# Altium PCB COF.PcbDoc (part 5 of 5)
Units mm, origin at the board's own origin, x right, y up, seen from the top; angles counter-clockwise.
Board outline 42.1 x 32.68 mm, 2 copper layers (TOP, BOTTOM), stack 0.321 mm thick; 42 components, 54 nets, 189 pads, 156 vias.
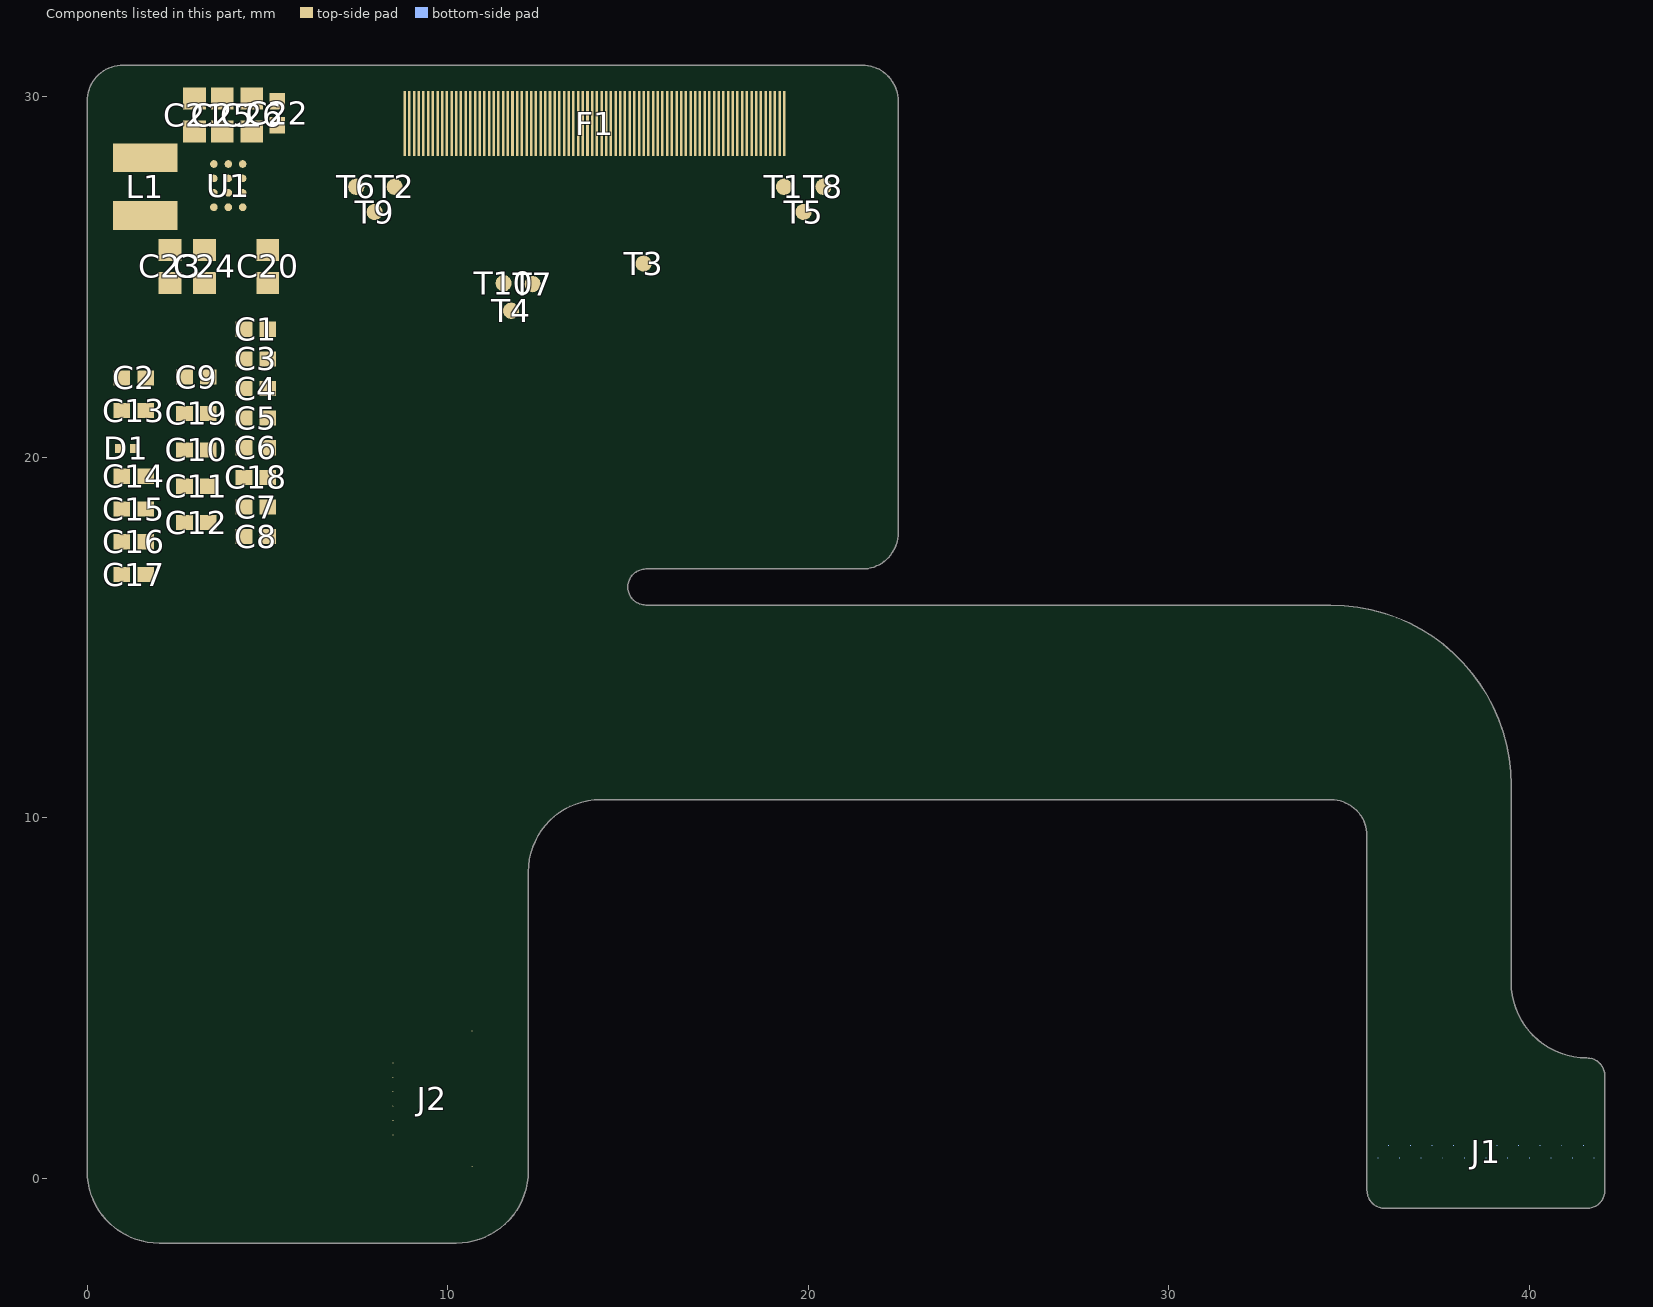
[diagram p4: the components of this part, seen from the top]

## Silkscreen, mask and mechanical layers (free items; w line width, h text height) (continued)
Fab Notes: (continued)
  text "408" at 15.683,33.612 h0.01
  text "S<144>" at 15.73,33.605 h0.01
  text "410" at 15.737,33.612 h0.01
  text "S<146>" at 15.784,33.605 h0.01
  text "412" at 15.791,33.612 h0.01
  text "S<148>" at 15.838,33.605 h0.01
  text "414" at 15.845,33.612 h0.01
  text "S<150>" at 15.892,33.605 h0.01
  text "416" at 15.899,33.612 h0.01
  text "S<152>" at 15.946,33.605 h0.01
  text "418" at 15.953,33.612 h0.01
  text "S<154>" at 16,33.605 h0.01
  text "420" at 16.007,33.612 h0.01
  text "S<156>" at 16.054,33.605 h0.01
  text "422" at 16.061,33.612 h0.01
  text "S<158>" at 16.108,33.605 h0.01
  text "424" at 16.115,33.612 h0.01
  text "S<160>" at 16.162,33.605 h0.01
  text "426" at 16.169,33.612 h0.01
  text "S<162>" at 16.216,33.605 h0.01
  text "428" at 16.223,33.612 h0.01
  text "S<164>" at 16.27,33.605 h0.01
  text "430" at 16.277,33.612 h0.01
  text "S<166>" at 16.324,33.605 h0.01
  text "432" at 16.331,33.612 h0.01
  text "S<168>" at 16.378,33.605 h0.01
  text "434" at 16.385,33.612 h0.01
  text "S<170>" at 16.432,33.605 h0.01
  text "436" at 16.439,33.612 h0.01
  text "S<172>" at 16.486,33.605 h0.01
  text "438" at 16.493,33.612 h0.01
  text "S<174>" at 16.54,33.605 h0.01
  text "440" at 16.547,33.612 h0.01
  text "S<176>" at 16.594,33.605 h0.01
  text "442" at 16.601,33.612 h0.01
  text "S<178>" at 16.648,33.605 h0.01
  text "444" at 16.655,33.612 h0.01
  text "S<180>" at 16.702,33.605 h0.01
  text "446" at 16.709,33.612 h0.01
  text "S<182>" at 16.756,33.605 h0.01
  text "448" at 16.763,33.612 h0.01
  text "S<184>" at 16.81,33.605 h0.01
  text "450" at 16.817,33.612 h0.01
  text "S<186>" at 16.864,33.605 h0.01
  text "452" at 16.871,33.612 h0.01
  text "S<188>" at 16.918,33.605 h0.01
  text "454" at 16.925,33.612 h0.01
  text "S<190>" at 16.972,33.605 h0.01
  text "456" at 16.979,33.612 h0.01
  text "S<192>" at 17.026,33.605 h0.01
  text "458" at 17.033,33.612 h0.01
  text "S<194>" at 17.08,33.605 h0.01
  text "460" at 17.087,33.612 h0.01
  text "S<196>" at 17.134,33.605 h0.01
  text "462" at 17.141,33.612 h0.01
  text "S<198>" at 17.188,33.605 h0.01
  text "464" at 17.195,33.612 h0.01
  text "S<200>" at 17.242,33.605 h0.01
  text "466" at 17.249,33.612 h0.01
  text "S<202>" at 17.296,33.605 h0.01
  text "468" at 17.303,33.612 h0.01
  text "S<204>" at 17.35,33.605 h0.01
  text "470" at 17.357,33.612 h0.01
  text "S<206>" at 17.404,33.605 h0.01
  text "472" at 17.411,33.612 h0.01
  text "S<208>" at 17.458,33.605 h0.01
  text "474" at 17.465,33.612 h0.01
  text "S<210>" at 17.512,33.605 h0.01
  text "476" at 17.519,33.612 h0.01
  text "S<212>" at 17.566,33.605 h0.01
  text "478" at 17.573,33.612 h0.01
  text "S<214>" at 17.62,33.605 h0.01
  text "480" at 17.627,33.612 h0.01
  text "S<216>" at 17.674,33.605 h0.01
  text "482" at 17.681,33.612 h0.01
  text "S<218>" at 17.728,33.605 h0.01
  text "484" at 17.735,33.612 h0.01
  text "S<220>" at 17.782,33.605 h0.01
  text "486" at 17.789,33.612 h0.01
  text "S<222>" at 17.836,33.605 h0.01
  text "488" at 17.843,33.612 h0.01
  text "S<224>" at 17.89,33.605 h0.01
  text "490" at 17.897,33.612 h0.01
  text "S<226>" at 17.944,33.605 h0.01
  text "492" at 17.951,33.612 h0.01
  text "S<228>" at 17.998,33.605 h0.01
  text "494" at 18.005,33.612 h0.01
  text "S<230>" at 18.052,33.605 h0.01
  text "496" at 18.059,33.612 h0.01
  text "S<232>" at 18.106,33.605 h0.01
  text "498" at 18.113,33.612 h0.01
  text "S<234>" at 18.16,33.605 h0.01
  text "500" at 18.167,33.612 h0.01
  text "DUMMY" at 18.235,33.605 h0.01
  text "502" at 18.243,33.612 h0.01
  text "VINT" at 18.304,33.605 h0.01
  text "504" at 18.306,33.612 h0.01
  text "VGH" at 18.368,33.605 h0.01
  text "506" at 18.369,33.612 h0.01
  text "VGL" at 18.431,33.605 h0.01
  text "508" at 18.432,33.612 h0.01
  text "DUMMY" at 18.487,33.605 h0.01
  text "510" at 18.495,33.612 h0.01
  text "GOA_L<1>" at 18.546,33.605 h0.01
  text "512" at 18.558,33.612 h0.01
  text "GOA_L<3>" at 18.609,33.605 h0.01
  text "514" at 18.621,33.612 h0.01
  text "GOA_L<5>" at 18.672,33.605 h0.01
  text "516" at 18.684,33.612 h0.01
  text "GOA_L<7>" at 18.735,33.605 h0.01
  text "518" at 18.747,33.612 h0.01
  text "GOA_L<9>" at 18.798,33.605 h0.01
  text "520" at 18.81,33.612 h0.01
  text "GOA_L<11>" at 18.859,33.605 h0.01
  text "522" at 18.873,33.612 h0.01
  text "GOA_L<13>" at 18.922,33.605 h0.01
  text "524" at 18.936,33.612 h0.01
  text "GOA_L<15>" at 18.985,33.605 h0.01
  text "526" at 18.999,33.612 h0.01
  text "Face Down" at 13.815,33.356 h0.08
  text "DUMMY_VGL" at 8.945,33.09 h0.01
  text "190" at 8.967,33.099 h0.01
  text "VGL" at 9.02,33.09 h0.01
  text "189" at 9.021,33.099 h0.01
  text "VGL" at 9.074,33.09 h0.01
  text "188" at 9.075,33.099 h0.01
  text "VGH" at 9.127,33.09 h0.01
  text "187" at 9.129,33.099 h0.01
  text "VGH" at 9.181,33.09 h0.01
  text "186" at 9.183,33.099 h0.01
  text "VINT" at 9.234,33.09 h0.01
  text "185" at 9.236,33.099 h0.01
  text "VINT" at 9.288,33.09 h0.01
  text "184" at 9.291,33.099 h0.01
  text "VLOUT2" at 9.335,33.09 h0.01
  text "183" at 9.345,33.099 h0.01
  text "VLOUT2" at 9.389,33.09 h0.01
  text "182" at 9.399,33.099 h0.01
  text "VLOUT2" at 9.443,33.09 h0.01
  text "181" at 9.454,33.099 h0.01
  text "VLOUT2" at 9.497,33.09 h0.01
  text "180" at 9.507,33.099 h0.01
  text "C41N" at 9.557,33.09 h0.01
  text "179" at 9.561,33.099 h0.01
  text "C41N" at 9.611,33.09 h0.01
  text "178" at 9.615,33.099 h0.01
  text "C41N" at 9.665,33.09 h0.01
  text "177" at 9.669,33.099 h0.01
  text "C41P" at 9.719,33.09 h0.01
  text "176" at 9.723,33.099 h0.01
  text "C41P" at 9.773,33.09 h0.01
  text "175" at 9.776,33.099 h0.01
  text "C41P" at 9.827,33.09 h0.01
  text "174" at 9.831,33.099 h0.01
  text "AVDD" at 9.88,33.09 h0.01
  text "173" at 9.885,33.099 h0.01
  text "AVDD" at 9.934,33.09 h0.01
  text "172" at 9.939,33.099 h0.01
  text "AVDD" at 9.988,33.09 h0.01
  text "171" at 9.994,33.099 h0.01
  text "AVDD" at 10.042,33.09 h0.01
  text "170" at 10.047,33.099 h0.01
  text "VSSC" at 10.096,33.09 h0.01
  text "169" at 10.101,33.099 h0.01
  text "VSSC" at 10.15,33.09 h0.01
  text "168" at 10.155,33.099 h0.01
  text "VSSC" at 10.204,33.09 h0.01
  text "167" at 10.209,33.099 h0.01
  text "VSSC" at 10.258,33.09 h0.01
  text "166" at 10.263,33.099 h0.01
  text "VSSA" at 10.312,33.09 h0.01
  text "165" at 10.316,33.099 h0.01
  text "VSSA" at 10.366,33.09 h0.01
  text "164" at 10.371,33.099 h0.01
  text "VSSA" at 10.42,33.09 h0.01
  text "163" at 10.425,33.099 h0.01
  text "VLOUT3" at 10.469,33.09 h0.01
  text "162" at 10.479,33.099 h0.01
  text "VLOUT3" at 10.523,33.09 h0.01
  text "161" at 10.534,33.099 h0.01
  text "VLOUT3" at 10.577,33.09 h0.01
  text "160" at 10.587,33.099 h0.01
  text "VLOUT3" at 10.631,33.09 h0.01
  text "159" at 10.641,33.099 h0.01
  text "C51N" at 10.691,33.09 h0.01
  text "158" at 10.695,33.099 h0.01
  text "C51N" at 10.745,33.09 h0.01
  text "157" at 10.749,33.099 h0.01
  text "C51N" at 10.799,33.09 h0.01
  text "156" at 10.803,33.099 h0.01
  text "C51P" at 10.853,33.09 h0.01
  text "155" at 10.856,33.099 h0.01
  text "C51P" at 10.907,33.09 h0.01
  text "154" at 10.911,33.099 h0.01
  text "C51P" at 10.961,33.09 h0.01
  text "153" at 10.965,33.099 h0.01
  text "VCL" at 11.018,33.09 h0.01
  text "152" at 11.019,33.099 h0.01
  text "VCL" at 11.072,33.09 h0.01
  text "151" at 11.074,33.099 h0.01
  text "VCL" at 11.126,33.09 h0.01
  text "150" at 11.127,33.099 h0.01
  text "149" at 11.181,33.099 h0.01
  text "VCI" at 11.182,33.09 h0.01
  text "148" at 11.235,33.099 h0.01
  text "VCI" at 11.236,33.09 h0.01
  text "147" at 11.289,33.099 h0.01
  text "VCI" at 11.29,33.09 h0.01
  text "NVREF" at 11.335,33.09 h0.01
  text "146" at 11.343,33.099 h0.01
  text "VMON" at 11.392,33.09 h0.01
  text "145" at 11.396,33.099 h0.01
  text "VREF" at 11.447,33.09 h0.01
  text "144" at 11.451,33.099 h0.01
  text "VDD" at 11.503,33.09 h0.01
  text "143" at 11.505,33.099 h0.01
  text "VDD" at 11.558,33.09 h0.01
  text "142" at 11.559,33.099 h0.01
  text "VDDI" at 11.611,33.09 h0.01
  text "141" at 11.614,33.099 h0.01
  text "VDDI" at 11.665,33.09 h0.01
  text "140" at 11.667,33.099 h0.01
  text "TEST_OUT2" at 11.702,33.09 h0.01
  text "139" at 11.721,33.099 h0.01
  text "TEST_OUT1" at 11.757,33.09 h0.01
  text "138" at 11.775,33.099 h0.01
  text "137" at 11.829,33.099 h0.01
  text "TE" at 11.831,33.09 h0.01
  text "OSC_FUSE" at 11.866,33.09 h0.01
  text "136" at 11.883,33.099 h0.01
  text "EL_CTRL" at 11.924,33.09 h0.01
  text "135" at 11.936,33.099 h0.01
  text "TOUT" at 11.986,33.09 h0.01
  text "134" at 11.991,33.099 h0.01
  text "ERR_FG" at 12.034,33.09 h0.01
  text "133" at 12.045,33.099 h0.01
  text "VSSI" at 12.097,33.09 h0.01
  text "132" at 12.099,33.099 h0.01
  text "D<7>" at 12.149,33.09 h0.01
  text "131" at 12.154,33.099 h0.01
  text "D<6>" at 12.203,33.09 h0.01
  text "130" at 12.207,33.099 h0.01
  text "D<5>" at 12.257,33.09 h0.01
  text "129" at 12.261,33.099 h0.01
  text "D<4>" at 12.311,33.09 h0.01
  text "128" at 12.315,33.099 h0.01
  text "D<3>" at 12.365,33.09 h0.01
  text "127" at 12.369,33.099 h0.01
  text "D<2>" at 12.419,33.09 h0.01
  text "126" at 12.423,33.099 h0.01
  text "SDI3_D<1>" at 12.46,33.09 h0.01
  text "125" at 12.476,33.099 h0.01
  text "SDI2_D<0>" at 12.514,33.09 h0.01
  text "124" at 12.531,33.099 h0.01
  text "SDI_RDX" at 12.572,33.09 h0.01
  text "123" at 12.585,33.099 h0.01
  text "SDO_SDI1" at 12.625,33.09 h0.01
  text "122" at 12.639,33.099 h0.01
  text "CSX" at 12.691,33.09 h0.01
  text "121" at 12.694,33.099 h0.01
  text "SCL_WRX" at 12.732,33.09 h0.01
  text "120" at 12.747,33.099 h0.01
  text "DCX" at 12.798,33.09 h0.01
  text "119" at 12.801,33.099 h0.01
  text "OTP_NOLOAD" at 12.831,33.09 h0.01
  text "118" at 12.855,33.099 h0.01
  text "TMODE<3>" at 12.892,33.09 h0.01
  text "117" at 12.909,33.099 h0.01
  text "TMODE<2>" at 12.946,33.09 h0.01
  text "116" at 12.963,33.099 h0.01
  text "TMODE<1>" at 13,33.09 h0.01
  text "115" at 13.016,33.099 h0.01
  text "TMODE<0>" at 13.054,33.09 h0.01
  text "114" at 13.071,33.099 h0.01
  text "VSSI" at 13.123,33.09 h0.01
  text "113" at 13.125,33.099 h0.01
  text "VSSI" at 13.177,33.09 h0.01
  text "112" at 13.179,33.099 h0.01
  text "VSSI" at 13.231,33.09 h0.01
  text "111" at 13.234,33.099 h0.01
  text "D0N" at 13.286,33.09 h0.01
  text "110" at 13.287,33.099 h0.01
  text "D0N" at 13.34,33.09 h0.01
  text "109" at 13.341,33.099 h0.01
  text "D0N" at 13.394,33.09 h0.01
  text "108" at 13.395,33.099 h0.01
  text "D0P" at 13.448,33.09 h0.01
  text "107" at 13.449,33.099 h0.01
  text "D0P" at 13.502,33.09 h0.01
  text "106" at 13.503,33.099 h0.01
  text "D0P" at 13.556,33.09 h0.01
  text "105" at 13.556,33.099 h0.01
  text "VSSI" at 13.609,33.09 h0.01
  text "104" at 13.611,33.099 h0.01
  text "CKN" at 13.663,33.09 h0.01
  text "103" at 13.665,33.099 h0.01
  text "CKN" at 13.717,33.09 h0.01
  text "102" at 13.719,33.099 h0.01
  text "CKN" at 13.771,33.09 h0.01
  text "101" at 13.774,33.099 h0.01
  text "CKP" at 13.825,33.09 h0.01
  text "100" at 13.827,33.099 h0.01
  text "CKP" at 13.879,33.09 h0.01
  text "99" at 13.884,33.099 h0.01
  text "CKP" at 13.933,33.09 h0.01
  text "98" at 13.938,33.099 h0.01
  text "VSSI" at 13.987,33.09 h0.01
  text "97" at 13.992,33.099 h0.01
  text "VSSI" at 14.041,33.09 h0.01
  text "96" at 14.046,33.099 h0.01
  text "VSSI" at 14.095,33.09 h0.01
  text "95" at 14.1,33.099 h0.01
  text "VSSI" at 14.149,33.09 h0.01
  text "94" at 14.154,33.099 h0.01
  text "VSSI" at 14.203,33.09 h0.01
  text "93" at 14.208,33.099 h0.01
  text "VSSI" at 14.257,33.09 h0.01
  text "92" at 14.262,33.099 h0.01
  text "VDD" at 14.312,33.09 h0.01
  text "91" at 14.317,33.099 h0.01
  text "VDD" at 14.366,33.09 h0.01
  text "90" at 14.37,33.099 h0.01
  text "VDD" at 14.42,33.09 h0.01
  text "89" at 14.424,33.099 h0.01
  text "VDD" at 14.474,33.09 h0.01
  text "88" at 14.478,33.099 h0.01
  text "VDD" at 14.528,33.09 h0.01
  text "87" at 14.532,33.099 h0.01
  text "VDD" at 14.582,33.09 h0.01
  text "86" at 14.586,33.099 h0.01
  text "VDDI" at 14.635,33.09 h0.01
  text "85" at 14.64,33.099 h0.01
  text "VDDI" at 14.689,33.09 h0.01
  text "84" at 14.694,33.099 h0.01
  text "VDDI" at 14.743,33.09 h0.01
  text "83" at 14.748,33.099 h0.01
  text "VDDI" at 14.797,33.09 h0.01
  text "82" at 14.802,33.099 h0.01
  text "VDDI" at 14.851,33.09 h0.01
  text "81" at 14.857,33.099 h0.01
  text "VDDI" at 14.905,33.09 h0.01
  text "80" at 14.91,33.099 h0.01
  text "VDDI" at 14.959,33.09 h0.01
  text "79" at 14.964,33.099 h0.01
  text "VSSA" at 15.01,33.09 h0.01
  text "78" at 15.018,33.099 h0.01
  text "VSSA" at 15.064,33.09 h0.01
  text "77" at 15.072,33.099 h0.01
  text "VSSA" at 15.118,33.09 h0.01
  text "76" at 15.126,33.099 h0.01
  text "VSSA" at 15.172,33.09 h0.01
  text "75" at 15.18,33.099 h0.01
  text "VSSA" at 15.226,33.09 h0.01
  text "74" at 15.234,33.099 h0.01
  text "RVDD_ON" at 15.27,33.09 h0.01
  text "73" at 15.288,33.099 h0.01
  text "RESX" at 15.333,33.09 h0.01
  text "72" at 15.342,33.099 h0.01
  text "TIN2" at 15.391,33.09 h0.01
  text "71" at 15.397,33.099 h0.01
  text "TIN1" at 15.446,33.09 h0.01
  text "70" at 15.45,33.099 h0.01
  text "BIST" at 15.498,33.09 h0.01
  text "69" at 15.504,33.099 h0.01
  text "PSWAP" at 15.546,33.09 h0.01
  text "68" at 15.558,33.099 h0.01
  text "TEST_IN" at 15.598,33.09 h0.01
  text "67" at 15.612,33.099 h0.01
  text "IM<0>" at 15.657,33.09 h0.01
  text "66" at 15.666,33.099 h0.01
  text "IM<1>" at 15.711,33.09 h0.01
  text "65" at 15.72,33.099 h0.01
  text "IM<2>" at 15.765,33.09 h0.01
  text "64" at 15.774,33.099 h0.01
  text "EXTCLK" at 15.814,33.09 h0.01
  text "63" at 15.828,33.099 h0.01
  text "VSSI" at 15.877,33.09 h0.01
  text "62" at 15.882,33.099 h0.01
  text "VSSI" at 15.931,33.09 h0.01
  text "61" at 15.937,33.099 h0.01
  text "VDDI" at 15.985,33.09 h0.01
  text "60" at 15.99,33.099 h0.01
  text "VDDI" at 16.039,33.09 h0.01
  text "59" at 16.044,33.099 h0.01
  text "VOTP" at 16.091,33.09 h0.01
  text "58" at 16.098,33.099 h0.01
  text "VDD" at 16.148,33.09 h0.01
  text "57" at 16.152,33.099 h0.01
  text "VDD" at 16.202,33.09 h0.01
  text "56" at 16.206,33.099 h0.01
  text "VREGOUT" at 16.242,33.09 h0.01
  text "55" at 16.26,33.099 h0.01
  text "VGS" at 16.309,33.09 h0.01
  text "54" at 16.314,33.099 h0.01
  text "VCL" at 16.364,33.09 h0.01
  text "53" at 16.368,33.099 h0.01
  text "VCL" at 16.418,33.09 h0.01
  text "52" at 16.422,33.099 h0.01
  text "VCL" at 16.472,33.09 h0.01
  text "51" at 16.477,33.099 h0.01
  text "VCL" at 16.526,33.09 h0.01
  text "50" at 16.53,33.099 h0.01
  text "C32N" at 16.577,33.09 h0.01
  text "49" at 16.584,33.099 h0.01
  text "C32N" at 16.631,33.09 h0.01
  text "48" at 16.638,33.099 h0.01
  text "C32N" at 16.685,33.09 h0.01
  text "47" at 16.692,33.099 h0.01
  text "C32P" at 16.739,33.09 h0.01
  text "46" at 16.746,33.099 h0.01
  text "C32P" at 16.793,33.09 h0.01
  text "45" at 16.8,33.099 h0.01
  text "C32P" at 16.847,33.09 h0.01
  text "44" at 16.854,33.099 h0.01
  text "C31N" at 16.901,33.09 h0.01
  text "43" at 16.908,33.099 h0.01
  text "C31N" at 16.955,33.09 h0.01
  text "42" at 16.962,33.099 h0.01
  text "C31N" at 17.009,33.09 h0.01
  text "41" at 17.017,33.099 h0.01
  text "C31P" at 17.063,33.09 h0.01
  text "40" at 17.07,33.099 h0.01
  text "C31P" at 17.117,33.09 h0.01
  text "39" at 17.124,33.099 h0.01
  text "C31P" at 17.171,33.09 h0.01
  text "38" at 17.178,33.099 h0.01
  text "VSSC" at 17.224,33.09 h0.01
  text "37" at 17.232,33.099 h0.01
  text "VSSC" at 17.278,33.09 h0.01
  text "36" at 17.286,33.099 h0.01
  text "VSSC" at 17.332,33.09 h0.01
  text "35" at 17.34,33.099 h0.01
  text "VCI" at 17.392,33.09 h0.01
  text "34" at 17.394,33.099 h0.01
  text "VCI" at 17.446,33.09 h0.01
  text "33" at 17.448,33.099 h0.01
  text "VCI" at 17.5,33.09 h0.01
  text "32" at 17.502,33.099 h0.01
  text "VCI" at 17.554,33.09 h0.01
  text "31" at 17.557,33.099 h0.01
  text "AVDD" at 17.602,33.09 h0.01
  text "30" at 17.61,33.099 h0.01
  text "AVDD" at 17.656,33.09 h0.01
  text "29" at 17.664,33.099 h0.01
  text "AVDD" at 17.71,33.09 h0.01
  text "28" at 17.718,33.099 h0.01
  text "AVDD" at 17.764,33.09 h0.01
  text "27" at 17.772,33.099 h0.01
  text "C12N" at 17.819,33.09 h0.01
  text "26" at 17.826,33.099 h0.01
  text "C12N" at 17.873,33.09 h0.01
  text "25" at 17.88,33.099 h0.01
  text "C12N" at 17.927,33.09 h0.01
  text "24" at 17.934,33.099 h0.01
  text "C12P" at 17.981,33.09 h0.01
  text "23" at 17.988,33.099 h0.01
  text "C12P" at 18.035,33.09 h0.01
  text "22" at 18.042,33.099 h0.01
  text "C12P" at 18.089,33.09 h0.01
  text "21" at 18.097,33.099 h0.01
  text "C11N" at 18.143,33.09 h0.01
  text "20" at 18.15,33.099 h0.01
  text "C11N" at 18.197,33.09 h0.01
  text "19" at 18.203,33.099 h0.01
  text "C11N" at 18.251,33.09 h0.01
  text "18" at 18.257,33.099 h0.01
  text "C11P" at 18.305,33.09 h0.01
  text "17" at 18.311,33.099 h0.01
  text "C11P" at 18.359,33.09 h0.01
  text "16" at 18.365,33.099 h0.01
  text "C11P" at 18.413,33.09 h0.01
  text "15" at 18.419,33.099 h0.01
  text "VSSA" at 18.466,33.09 h0.01
  text "14" at 18.473,33.099 h0.01
  text "VSSA" at 18.52,33.09 h0.01
  text "13" at 18.527,33.099 h0.01
  text "VSSA" at 18.574,33.09 h0.01
  text "12" at 18.581,33.099 h0.01
  text "ELVDD" at 18.625,33.09 h0.01
  text "11" at 18.636,33.099 h0.01
  text "ELVDD" at 18.679,33.09 h0.01
  text "10" at 18.689,33.099 h0.01
  text "ELVSS" at 18.734,33.09 h0.01
  text "9" at 18.746,33.099 h0.01
  text "ELVSS" at 18.788,33.09 h0.01
  text "8" at 18.8,33.099 h0.01
  text "VINT" at 18.846,33.09 h0.01
  text "7" at 18.854,33.099 h0.01
  text "VINT" at 18.9,33.09 h0.01
  text "6" at 18.908,33.099 h0.01
  text "VGH" at 18.955,33.09 h0.01
  text "5" at 18.962,33.099 h0.01
  text "VGH" at 19.009,33.09 h0.01
  text "4" at 19.017,33.099 h0.01
  text "VGL" at 19.064,33.09 h0.01
  text "3" at 19.07,33.099 h0.01
  text "VGL" at 19.118,33.09 h0.01
  text "2" at 19.125,33.099 h0.01
  text "DUMMY_VGL" at 19.151,33.09 h0.01
  text "1" at 19.179,33.099 h0.01
  text "9" at 18.323,29.467 h0.04 r90
  text "8" at 18.453,29.467 h0.04 r90
  text "7" at 18.583,29.467 h0.04 r90
  text "6" at 18.713,29.467 h0.04 r90
  text "5" at 18.843,29.467 h0.04 r90
  text "4" at 18.973,29.467 h0.04 r90
  text "3" at 19.103,29.467 h0.04 r90
  text "2" at 19.233,29.467 h0.04 r90
  text "1" at 19.363,29.467 h0.04 r90
  text "82" at 8.833,29.451 h0.04 r90
  text "81" at 8.963,29.451 h0.04 r90
  text "80" at 9.093,29.451 h0.04 r90
  text "79" at 9.223,29.451 h0.04 r90
  text "78" at 9.353,29.451 h0.04 r90
  text "77" at 9.483,29.451 h0.04 r90
  text "76" at 9.613,29.451 h0.04 r90
  text "75" at 9.743,29.451 h0.04 r90
  text "74" at 9.873,29.451 h0.04 r90
  text "73" at 10.003,29.451 h0.04 r90
  text "72" at 10.133,29.451 h0.04 r90
  text "71" at 10.263,29.451 h0.04 r90
  text "70" at 10.393,29.451 h0.04 r90
  text "69" at 10.523,29.451 h0.04 r90
  text "68" at 10.653,29.451 h0.04 r90
  text "67" at 10.783,29.451 h0.04 r90
  text "66" at 10.913,29.451 h0.04 r90
  text "65" at 11.043,29.451 h0.04 r90
  text "64" at 11.173,29.451 h0.04 r90
  text "63" at 11.303,29.451 h0.04 r90
  text "62" at 11.433,29.451 h0.04 r90
  text "61" at 11.563,29.451 h0.04 r90
  text "60" at 11.693,29.451 h0.04 r90
  text "59" at 11.823,29.451 h0.04 r90
  text "58" at 11.953,29.451 h0.04 r90
  text "57" at 12.083,29.451 h0.04 r90
  text "56" at 12.213,29.451 h0.04 r90
  text "55" at 12.343,29.451 h0.04 r90
  text "54" at 12.473,29.451 h0.04 r90
  text "53" at 12.603,29.451 h0.04 r90
  text "52" at 12.733,29.451 h0.04 r90
  text "51" at 12.863,29.451 h0.04 r90
  text "50" at 12.993,29.451 h0.04 r90
  text "49" at 13.123,29.451 h0.04 r90
  text "48" at 13.253,29.451 h0.04 r90
  text "47" at 13.383,29.451 h0.04 r90
  text "46" at 13.513,29.451 h0.04 r90
  text "45" at 13.643,29.451 h0.04 r90
  text "44" at 13.773,29.451 h0.04 r90
  text "43" at 13.903,29.451 h0.04 r90
  text "42" at 14.033,29.451 h0.04 r90
  text "41" at 14.163,29.451 h0.04 r90
  text "40" at 14.293,29.451 h0.04 r90
  text "39" at 14.423,29.451 h0.04 r90
  text "38" at 14.553,29.451 h0.04 r90
  text "37" at 14.683,29.451 h0.04 r90
  text "36" at 14.813,29.451 h0.04 r90
  text "35" at 14.943,29.451 h0.04 r90
  text "34" at 15.073,29.451 h0.04 r90
  text "33" at 15.203,29.451 h0.04 r90
  text "32" at 15.333,29.451 h0.04 r90
  text "31" at 15.463,29.451 h0.04 r90
  text "30" at 15.593,29.451 h0.04 r90
  text "29" at 15.723,29.451 h0.04 r90
  text "28" at 15.853,29.451 h0.04 r90
  text "27" at 15.983,29.451 h0.04 r90
  text "26" at 16.113,29.451 h0.04 r90
  text "25" at 16.243,29.451 h0.04 r90
  text "24" at 16.373,29.451 h0.04 r90
  text "23" at 16.503,29.451 h0.04 r90
  text "22" at 16.633,29.451 h0.04 r90
  text "21" at 16.763,29.451 h0.04 r90
  text "20" at 16.893,29.451 h0.04 r90
  text "19" at 17.023,29.451 h0.04 r90
  text "18" at 17.153,29.451 h0.04 r90
  text "17" at 17.283,29.451 h0.04 r90
  text "16" at 17.413,29.451 h0.04 r90
  text "15" at 17.543,29.451 h0.04 r90
  text "14" at 17.673,29.451 h0.04 r90
  text "13" at 17.803,29.451 h0.04 r90
  text "12" at 17.933,29.451 h0.04 r90
  text "11" at 18.063,29.451 h0.04 r90
  text "10" at 18.193,29.451 h0.04 r90
  text "FOG_L2/FOF_L" at 19.193,29.419 h0.04 r270
  text "SDO_SDI1" at 13.473,29.355 h0.04 r270
  text "VREGOUT" at 15.943,29.355 h0.04 r270
  text "EL_CTRL" at 12.043,29.34 h0.04 r270
  text "ERR_FG" at 12.173,29.33 h0.04 r270
  text "SDI_RDX" at 13.343,29.338 h0.04 r270
  text "SCL_WRX" at 13.733,29.352 h0.04 r270
  text "UELVDD" at 17.893,29.33 h0.04 r270
  text "FOG_R1" at 8.793,29.329 h0.04 r270
  text "FOG_R2/FOF_R" at 8.923,29.325 h0.04 r270
  text "FOF_R" at 9.053,29.309 h0.04 r270
  text "ELVSS" at 9.183,29.307 h0.04 r270
  text "ELVSS" at 9.313,29.307 h0.04 r270
  text "DUMMY" at 9.443,29.322 h0.04 r270
  text "ELVDD" at 9.573,29.31 h0.04 r270
  text "ELVDD" at 9.703,29.31 h0.04 r270
  text "DUMMY" at 9.833,29.322 h0.04 r270
  text "DUMMY" at 10.093,29.322 h0.04 r270
  text "VLOUT2" at 10.353,29.326 h0.04 r270
  text "VLOUT3" at 11.133,29.326 h0.04 r270
  text "PSWAP" at 15.423,29.318 h0.04 r270
  text "DUMMY" at 18.023,29.322 h0.04 r270
  text "UELVSS" at 18.153,29.327 h0.04 r270
  text "ELVDD" at 18.413,29.31 h0.04 r270
  text "ELVDD" at 18.543,29.31 h0.04 r270
  text "DUMMY" at 18.673,29.322 h0.04 r270
  text "ELVSS" at 18.803,29.307 h0.04 r270
  text "ELVSS" at 18.933,29.307 h0.04 r270
  text "FOG_L1" at 19.323,29.324 h0.04 r270
  text "C41N" at 10.483,29.288 h0.04 r270
  text "C41P" at 10.613,29.287 h0.04 r270
  text "AVDD" at 10.743,29.295 h0.04 r270
  text "VSSC" at 10.873,29.293 h0.04 r270
  text "VSSA" at 11.003,29.292 h0.04 r270
  text "C51N" at 11.263,29.288 h0.04 r270
  text "C51P" at 11.393,29.287 h0.04 r270
  text "VREF" at 11.653,29.291 h0.04 r270
  text "D<7>" at 12.303,29.285 h0.04 r270
  text "D<6>" at 12.433,29.285 h0.04 r270
  text "D<5>" at 12.563,29.285 h0.04 r270
  text "D<4>" at 12.693,29.285 h0.04 r270
  text "D<3>" at 12.823,29.285 h0.04 r270
  text "D<2>" at 12.953,29.285 h0.04 r270
  text "SDI3" at 13.083,29.279 h0.04 r270
  text "SDI2" at 13.213,29.279 h0.04 r270
  text "VSSI" at 13.993,29.281 h0.04 r270
  text "VSSI" at 14.383,29.281 h0.04 r270
  text "VSSI" at 14.773,29.281 h0.04 r270
  text "VDDI" at 15.033,29.284 h0.04 r270
  text "VSSA" at 15.163,29.292 h0.04 r270
  text "RESX" at 15.293,29.293 h0.04 r270
  text "IM[0]" at 15.553,29.279 h0.04 r270
  text "IM[1]" at 15.683,29.279 h0.04 r270
  text "VOTP" at 15.813,29.293 h0.04 r270
  text "C32N" at 16.333,29.288 h0.04 r270
  text "C32P" at 16.463,29.287 h0.04 r270
  text "C31N" at 16.593,29.288 h0.04 r270
  text "C31P" at 16.723,29.287 h0.04 r270
  text "VSSC" at 16.853,29.293 h0.04 r270
  text "AVDD" at 17.113,29.295 h0.04 r270
  text "C12N" at 17.243,29.288 h0.04 r270
  text "C12P" at 17.373,29.287 h0.04 r270
  text "C11N" at 17.503,29.288 h0.04 r270
  text "C11P" at 17.633,29.287 h0.04 r270
  text "VSSA" at 17.763,29.292 h0.04 r270
  text "VINT" at 18.283,29.281 h0.04 r270
  text "FOF_L" at 19.063,29.304 h0.04 r270
  text "VGL" at 9.963,29.273 h0.04 r270
  text "VGH" at 10.223,29.278 h0.04 r270
  text "VCI" at 11.523,29.264 h0.04 r270
  text "VDD" at 11.783,29.276 h0.04 r270
  text "CSX" at 13.603,29.274 h0.04 r270
  text "DCX" at 13.863,29.276 h0.04 r270
  text "D0N" at 14.123,29.273 h0.04 r270
  text "D0P" at 14.253,29.271 h0.04 r270
  text "CKN" at 14.513,29.276 h0.04 r270
  text "CKP" at 14.643,29.274 h0.04 r270
  text "VDD" at 14.903,29.276 h0.04 r270
  text "VGS" at 16.073,29.276 h0.04 r270
  text "VCL" at 16.203,29.271 h0.04 r270
  text "VCI" at 16.983,29.264 h0.04 r270
  text "TE" at 11.913,29.253 h0.04 r270
Drill Drawing:
  circle w0.254: c-3.244,115.286 r0.701
  lines w0.381: -5.215,113.639 118.211,113.639 ; -5.215,116.793 118.211,116.793 ; 2.891,110.484 2.891,119.947 ; 10.226,110.484 10.226,119.947 ; 23.382,110.484 23.382,119.947 ; 29.668,110.484 29.668,119.947 ; 38.82,110.484 38.82,119.947 ; 51.337,110.484 51.337,119.947 ; 58.836,110.484 58.836,119.947 ; 68.632,110.484 68.632,119.947 ; 77.24,110.484 77.24,119.947 ; 87.078,110.484 87.078,119.947 ; 102.377,110.484 102.377,119.947 ; -5.215,110.484 118.211,110.484 118.211,119.947 -5.215,119.947 -5.215,110.484
  text "Symbol" at -3.323,117.739 h1.83
  text "Count" at 3.837,117.739 h1.83
  text "Hole Size" at 11.173,117.739 h1.83
  text "Plated" at 24.329,117.739 h1.83
  text "Hole Type" at 30.614,117.739 h1.83
  text "Drill Layer Pair" at 39.766,117.739 h1.83
  text "Via/Pad" at 52.284,117.739 h1.83
  text "Pad Shape" at 59.782,117.739 h1.83
  text "Template" at 69.578,117.739 h1.83
  text "Description" at 78.186,117.739 h1.83
  text "Hole Tolerance (+)" at 88.024,117.739 h1.83
  text "Hole Tolerance (-)" at 103.323,117.739 h1.83
  text "156" at 3.837,114.585 h1.52
  text "0.075mm (2.95mil)" at 11.173,114.585 h1.52
  text "PTH" at 24.329,114.585 h1.52
  text "Round" at 30.614,114.585 h1.52
  text "TOP - BOTTOM" at 39.766,114.585 h1.52
  text "Via" at 52.284,114.585 h1.52
  text "Rounded" at 59.782,114.585 h1.52
  text "(Mixed)" at 69.578,114.585 h1.52
  text "156 Total" at 3.837,111.431 h1.52

## Dimensions
2,-1.803 to 1,30.876 on Dimensions
0,0.197 to 42.104,-0.341 on Dimensions